# Altium PCB PCB_ChessBot V1.pcbdoc
Units mil, origin at the board's own origin, x right, y up, seen from the top; angles counter-clockwise.
Board outline 12624.15 x 12821 mil, 2 copper layers (Top Layer, Bottom Layer); 77 components, 87 nets, 345 pads, 82 vias.
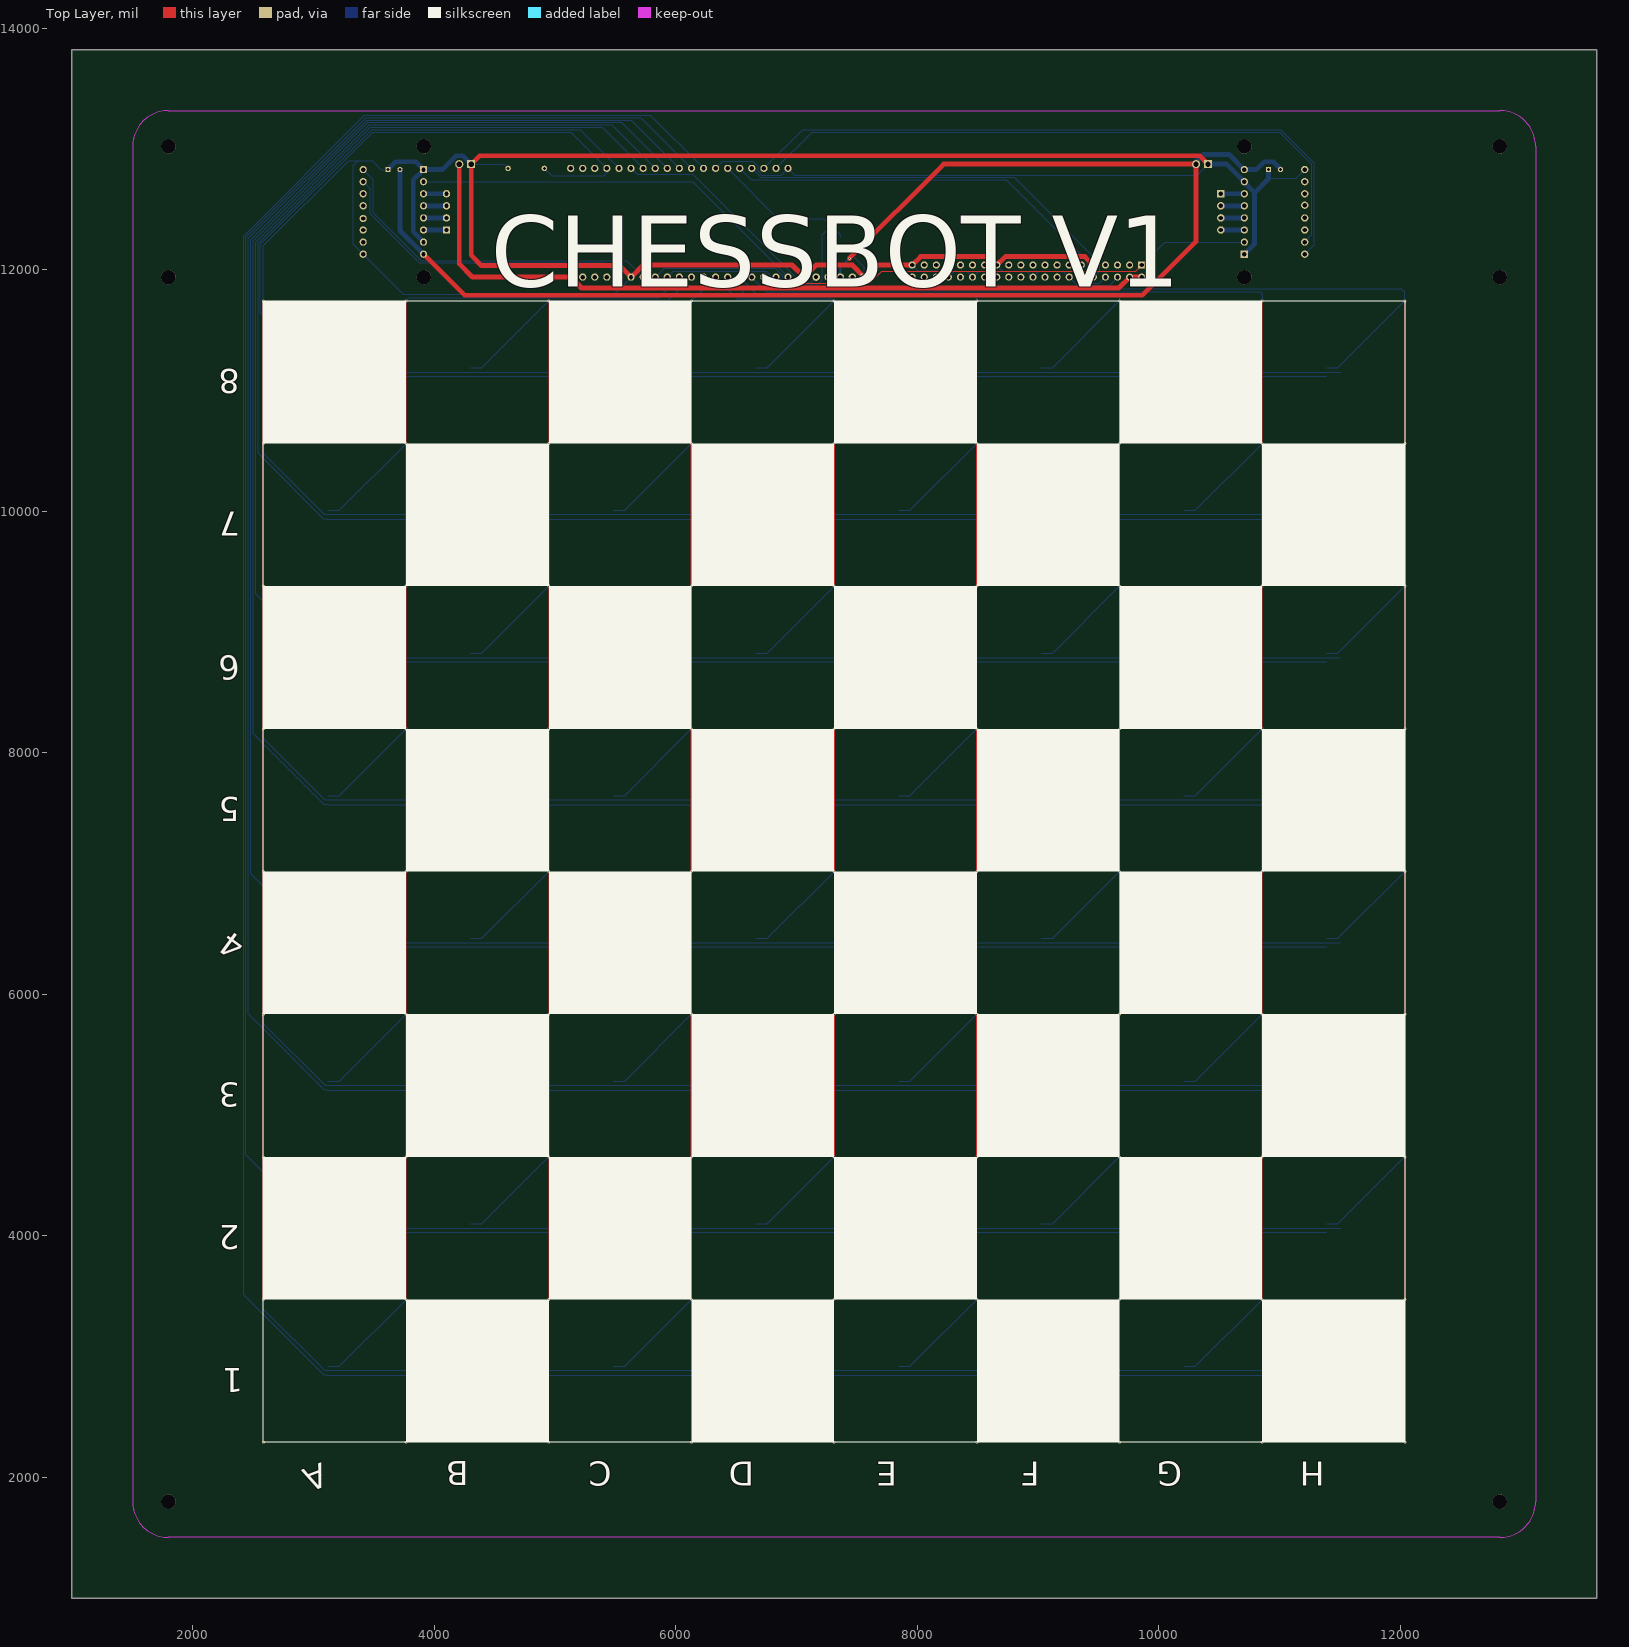
[diagram p0: Top Layer view]
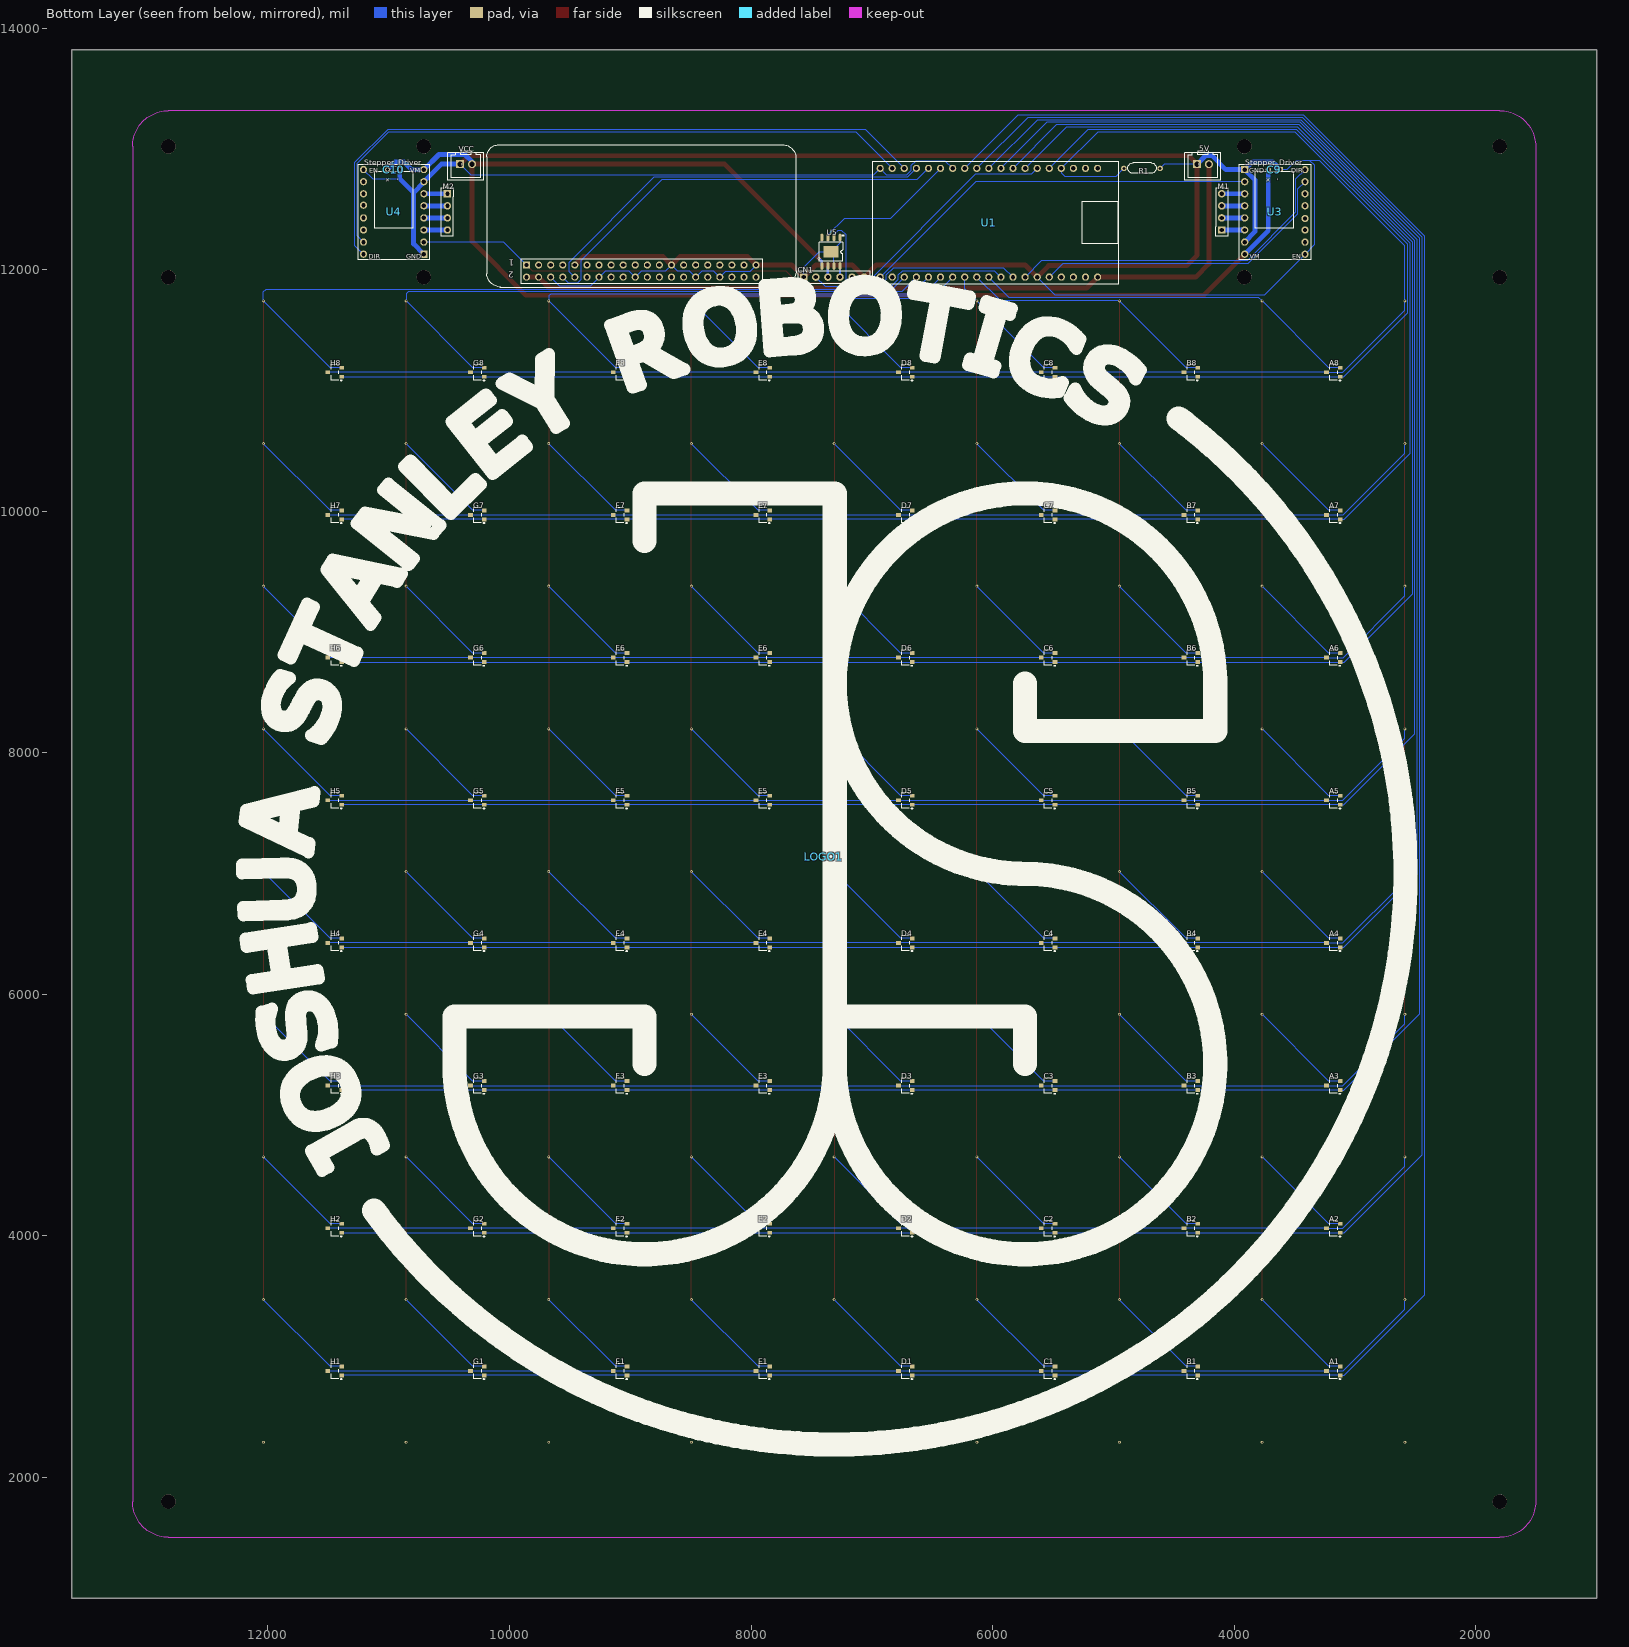
[diagram p1: Bottom Layer view, seen from below]

## Layer stack, top to bottom
Top Layer: signal copper (thickness not stored)
Dielectric: dielectric 12.6, FR-4, Dk 4.8
Bottom Layer: signal copper (thickness not stored)

## Board outline
13624.15,1000 1000,1000 1000,13821 13624.15,13821

## Components (designator, comment, footprint, x,y, rotation, side; value= is the part's Value field where it differs from the comment)
5V "XHB-2A" CONN-TH_XHB-2A 4258.27,12872.95 r180 bottom
A1 "AH49F" SC-59-3_L2.9-W1.6-P0.95-LS2.9-BR 3178.22,2882.95 r0 bottom
A2 "AH49F" SC-59-3_L2.9-W1.6-P0.95-LS2.9-BR 3178.22,4064.05 r0 bottom
A3 "AH49F" SC-59-3_L2.9-W1.6-P0.95-LS2.9-BR 3178.22,5245.15 r0 bottom
A4 "AH49F" SC-59-3_L2.9-W1.6-P0.95-LS2.9-BR 3178.22,6426.25 r0 bottom
A5 "AH49F" SC-59-3_L2.9-W1.6-P0.95-LS2.9-BR 3178.22,7607.35 r0 bottom
A6 "AH49F" SC-59-3_L2.9-W1.6-P0.95-LS2.9-BR 3178.22,8788.45 r0 bottom
A7 "AH49F" SC-59-3_L2.9-W1.6-P0.95-LS2.9-BR 3178.22,9969.55 r0 bottom
A8 "AH49F" SC-59-3_L2.9-W1.6-P0.95-LS2.9-BR 3178.22,11150.65 r0 bottom
B1 "AH49F" SC-59-3_L2.9-W1.6-P0.95-LS2.9-BR 4359.32,2882.95 r0 bottom
B2 "AH49F" SC-59-3_L2.9-W1.6-P0.95-LS2.9-BR 4359.32,4064.05 r0 bottom
B3 "AH49F" SC-59-3_L2.9-W1.6-P0.95-LS2.9-BR 4359.32,5245.15 r0 bottom
B4 "AH49F" SC-59-3_L2.9-W1.6-P0.95-LS2.9-BR 4359.32,6426.25 r0 bottom
B5 "AH49F" SC-59-3_L2.9-W1.6-P0.95-LS2.9-BR 4359.32,7607.35 r0 bottom
B6 "AH49F" SC-59-3_L2.9-W1.6-P0.95-LS2.9-BR 4359.32,8788.45 r0 bottom
B7 "AH49F" SC-59-3_L2.9-W1.6-P0.95-LS2.9-BR 4359.32,9969.55 r0 bottom
B8 "AH49F" SC-59-3_L2.9-W1.6-P0.95-LS2.9-BR 4359.32,11150.65 r0 bottom
C1 "AH49F" SC-59-3_L2.9-W1.6-P0.95-LS2.9-BR 5540.43,2882.95 r0 bottom
C2 "AH49F" SC-59-3_L2.9-W1.6-P0.95-LS2.9-BR 5540.43,4064.05 r0 bottom
C3 "AH49F" SC-59-3_L2.9-W1.6-P0.95-LS2.9-BR 5540.43,5245.15 r0 bottom
C4 "AH49F" SC-59-3_L2.9-W1.6-P0.95-LS2.9-BR 5540.43,6426.25 r0 bottom
C5 "AH49F" SC-59-3_L2.9-W1.6-P0.95-LS2.9-BR 5540.43,7607.35 r0 bottom
C6 "AH49F" SC-59-3_L2.9-W1.6-P0.95-LS2.9-BR 5540.43,8788.45 r0 bottom
C7 "AH49F" SC-59-3_L2.9-W1.6-P0.95-LS2.9-BR 5540.43,9969.55 r0 bottom
C8 "AH49F" SC-59-3_L2.9-W1.6-P0.95-LS2.9-BR 5540.43,11150.65 r0 bottom
C9 "100uF" "8X12 CAP" 3668.22,12827.95 r0 bottom
C10 "100uF" "8X12 CAP" 10958.23,12827.95 r0 bottom
CN1 "HDR-M-2.54_1x6" HDR-M-2.54_1X6 7313.23,11938.05 r0 bottom
D1 "AH49F" SC-59-3_L2.9-W1.6-P0.95-LS2.9-BR 6721.52,2882.95 r0 bottom
D2 "AH49F" SC-59-3_L2.9-W1.6-P0.95-LS2.9-BR 6721.52,4064.05 r0 bottom
D3 "AH49F" SC-59-3_L2.9-W1.6-P0.95-LS2.9-BR 6721.52,5245.15 r0 bottom
D4 "AH49F" SC-59-3_L2.9-W1.6-P0.95-LS2.9-BR 6721.52,6426.25 r0 bottom
D5 "AH49F" SC-59-3_L2.9-W1.6-P0.95-LS2.9-BR 6721.52,7607.35 r0 bottom
D6 "AH49F" SC-59-3_L2.9-W1.6-P0.95-LS2.9-BR 6721.52,8788.45 r0 bottom
D7 "AH49F" SC-59-3_L2.9-W1.6-P0.95-LS2.9-BR 6721.52,9969.55 r0 bottom
D8 "AH49F" SC-59-3_L2.9-W1.6-P0.95-LS2.9-BR 6721.52,11150.65 r0 bottom
E1 "AH49F" SC-59-3_L2.9-W1.6-P0.95-LS2.9-BR 7902.62,2882.95 r0 bottom
E2 "AH49F" SC-59-3_L2.9-W1.6-P0.95-LS2.9-BR 7902.62,4064.05 r0 bottom
E3 "AH49F" SC-59-3_L2.9-W1.6-P0.95-LS2.9-BR 7902.62,5245.15 r0 bottom
E4 "AH49F" SC-59-3_L2.9-W1.6-P0.95-LS2.9-BR 7902.62,6426.25 r0 bottom
E5 "AH49F" SC-59-3_L2.9-W1.6-P0.95-LS2.9-BR 7902.62,7607.35 r0 bottom
E6 "AH49F" SC-59-3_L2.9-W1.6-P0.95-LS2.9-BR 7902.62,8788.45 r0 bottom
E7 "AH49F" SC-59-3_L2.9-W1.6-P0.95-LS2.9-BR 7902.62,9969.55 r0 bottom
E8 "AH49F" SC-59-3_L2.9-W1.6-P0.95-LS2.9-BR 7902.62,11150.65 r0 bottom
F1 "AH49F" SC-59-3_L2.9-W1.6-P0.95-LS2.9-BR 9083.73,2882.95 r0 bottom
F2 "AH49F" SC-59-3_L2.9-W1.6-P0.95-LS2.9-BR 9083.73,4064.05 r0 bottom
F3 "AH49F" SC-59-3_L2.9-W1.6-P0.95-LS2.9-BR 9083.73,5245.15 r0 bottom
F4 "AH49F" SC-59-3_L2.9-W1.6-P0.95-LS2.9-BR 9083.73,6426.25 r0 bottom
F5 "AH49F" SC-59-3_L2.9-W1.6-P0.95-LS2.9-BR 9083.73,7607.35 r0 bottom
F6 "AH49F" SC-59-3_L2.9-W1.6-P0.95-LS2.9-BR 9083.73,8788.45 r0 bottom
F7 "AH49F" SC-59-3_L2.9-W1.6-P0.95-LS2.9-BR 9083.73,9969.55 r0 bottom
F8 "AH49F" SC-59-3_L2.9-W1.6-P0.95-LS2.9-BR 9083.73,11150.65 r0 bottom
G1 "AH49F" SC-59-3_L2.9-W1.6-P0.95-LS2.9-BR 10264.83,2882.95 r0 bottom
G2 "AH49F" SC-59-3_L2.9-W1.6-P0.95-LS2.9-BR 10264.83,4064.05 r0 bottom
G3 "AH49F" SC-59-3_L2.9-W1.6-P0.95-LS2.9-BR 10264.83,5245.15 r0 bottom
G4 "AH49F" SC-59-3_L2.9-W1.6-P0.95-LS2.9-BR 10264.83,6426.25 r0 bottom
G5 "AH49F" SC-59-3_L2.9-W1.6-P0.95-LS2.9-BR 10264.83,7607.35 r0 bottom
G6 "AH49F" SC-59-3_L2.9-W1.6-P0.95-LS2.9-BR 10264.83,8788.45 r0 bottom
G7 "AH49F" SC-59-3_L2.9-W1.6-P0.95-LS2.9-BR 10264.83,9969.55 r0 bottom
G8 "AH49F" SC-59-3_L2.9-W1.6-P0.95-LS2.9-BR 10264.83,11150.65 r0 bottom
H1 "AH49F" SC-59-3_L2.9-W1.6-P0.95-LS2.9-BR 11445.92,2882.95 r0 bottom
H2 "AH49F" SC-59-3_L2.9-W1.6-P0.95-LS2.9-BR 11445.92,4064.05 r0 bottom
H3 "AH49F" SC-59-3_L2.9-W1.6-P0.95-LS2.9-BR 11445.92,5245.15 r0 bottom
H4 "AH49F" SC-59-3_L2.9-W1.6-P0.95-LS2.9-BR 11445.92,6426.25 r0 bottom
H5 "AH49F" SC-59-3_L2.9-W1.6-P0.95-LS2.9-BR 11445.92,7607.35 r0 bottom
H6 "AH49F" SC-59-3_L2.9-W1.6-P0.95-LS2.9-BR 11445.92,8788.45 r0 bottom
H7 "AH49F" SC-59-3_L2.9-W1.6-P0.95-LS2.9-BR 11445.92,9969.55 r0 bottom
H8 "AH49F" SC-59-3_L2.9-W1.6-P0.95-LS2.9-BR 11445.92,11150.65 r0 bottom
LOGO1 "_" ? 7398.23,7137.95 r0 bottom
M1 "HDR-M-2.54_1x4" HDR-M-2.54_1X4 4103.23,12477.95 r270 bottom
M2 "HDR-M-2.54_1x4" HDR-M-2.54_1X4 10513.23,12477.95 r90 bottom
R1 "10k" "1/4W RESISTOR" 4613.23,12837.95 r180 bottom
U1 "ESP-WROOM-32" ESP32 6930.94,11938.05 r270 bottom
U3 "Stepper_Driver" STEPPER_DRIVER 3413.22,12127.95 r180 bottom
U4 "Stepper_Driver" STEPPER_DRIVER 11208.23,12827.95 r0 bottom
U5 "DRV8872DDARQ1" SO-8_L4.9-W3.9-P1.27-LS6.0-BL-EP5.1 7338.23,12147.95 r180 bottom
VCC "XHB-2A" CONN-TH_XHB-2A 10358.23,12872.95 r180 bottom

## Footprints (in the part's own frame and the unit in brackets; to place one, negate y for a bottom-side part, rotate by r counter-clockwise, add the part's x,y. Pads: shape width x height; smd on the part's side, far side on the other; paste and mask are expansions set on the pad)
"1/4W RESISTOR" [mil]
  round 45 hole 23.62 paste+0 mask+2: 1(0,0) 2(-300,0)
  silkscreen extent -268,-41 -32,46
"8X12 CAP" [mm]
  round 1.1 hole 0.6 paste+0 mask+0.051: 1(1.27,0)
  rect 1.1x1.1 hole 0.6 paste+0 mask+0.051: 2(-1.273,0)
  silkscreen extent -4,0.3 4,12.3
CONN-TH_XHB-2A [mm]
  rect 1.7x1.7 hole 1.1 paste+0 mask+0.051: 1(-1.251,0)
  round 1.7 hole 1.1 paste+0 mask+0.051: 2(1.251,0)
  silkscreen extent -3.86,-3.4 3.75,2.84
ESP32 [mil]
  round 60 hole 36 paste+0 mask+2: 1(0,0) 2(0,100) 3(0,200) 4(0,300) 5(0,400) 6(0,500) 7(0,600) 8(0,700) 9(0,800) 10(0,900) 11(0,1000) 12(0,1100) 13(0,1200) 14(0,1300) 15(0,1400) 16(0,1500) 17(0,1600) 18(0,1700) 19(0,1800) 20(-900,1800) 21(-900,1700) 22(-900,1600) 23(-900,1500) 24(-900,1400) 25(-900,1300) 26(-900,1200) 27(-900,1100) 28(-900,1000) 29(-900,900) 30(-900,800) 31(-900,700) 32(-900,600) 33(-900,500) 34(-900,400) 35(-900,300) 36(-900,200) 37(-900,100) 38(-900,0)
  silkscreen extent -960,-60 60,1970
HDR-M-2.54_1X4 [mil]
  rect 62x62 hole 35 paste+0 mask+2: 1(150,0)
  round 62 hole 35 paste+0 mask+2: 2(50,0) 3(-50,0) 4(-150,0)
  silkscreen extent -200,-50 200,50
HDR-M-2.54_1X6 [mil]
  rect 62x62 hole 35 paste+0 mask+2: 1(250,0)
  round 62 hole 35 paste+0 mask+2: 2(150,0) 3(50,0) 4(-50,0) 5(-150,0) 6(-250,0)
  silkscreen extent -300,-50 300,50
SC-59-3_L2.9-W1.6-P0.95-LS2.9-BR [mm]
  rect 1x0.8 smd paste+0 mask+0.051: 1(-1.45,0.95) 2(-1.45,-0.95) 3(1.45,0.015)
  silkscreen extent -1.49,-1.65 0.76,1.85
SO-8_L4.9-W3.9-P1.27-LS6.0-BL-EP5.1 [mm]
  oval 0.6x1.6 smd paste+0 mask+0.051: 1(1.905,3) 2(0.635,3) 3(-0.635,3) 4(-1.905,3) 5(-1.905,-3) 6(-0.635,-3) 7(0.635,-3) 8(1.905,-3)
  rect 3.1x2.4 smd paste+0 mask+0.051: 9(0,0)
  silkscreen extent -2.5,-2 2.71,3.6
STEPPER_DRIVER [mil]
  round 60 hole 36 paste+0 mask+2: 1(0,0) 2(0,100) 3(0,200) 4(0,295) 5(0,400) 6(0,500) 7(0,600) 8(0,700) 9(-500,0) 10(-500,100) 11(-500,200) 12(-500,300) 13(-500,400) 14(-500,500) 15(-500,600)
  rect 60x60 hole 36 paste+0 mask+2: 16(-500,700)
  silkscreen extent -545,-45 45,745
? [mil]
  silkscreen extent -4816,-4769 4816,4864

## Free pads (board coordinates)
  rect 59x59 hole 36 paste+0 mask+2: 1(9858.19,12037.95)
  round 59 hole 36 paste+0 mask+2: 2(9858.23,11937.95) 3(9758.23,12037.95) 4(9758.23,11937.95) 5(9658.23,12037.95) 6(9658.23,11937.95) 7(9558.23,12037.95) 8(9558.23,11937.95) 9(9458.23,12037.95) 10(9458.23,11937.95) 11(9358.23,12037.95) 12(9358.23,11937.95) 13(9258.23,12037.95) 14(9258.23,11937.95) 15(9158.23,12037.95) 16(9158.23,11937.95) 17(9058.23,12037.95) 18(9058.23,11937.95) 19(8958.23,12037.95) 20(8958.23,11937.95) 21(8858.23,12037.95) 22(8858.23,11937.95) 23(8758.23,12037.95) 24(8758.23,11937.95) 25(8658.23,12037.95) 26(8658.23,11937.95) 27(8558.23,12037.95) 28(8558.23,11937.95) 29(8458.23,12037.95) 30(8458.23,11937.95) 31(8358.23,12037.95) 32(8358.23,11937.95) 33(8258.23,12037.95) 34(8258.23,11937.95) 35(8158.23,12037.95) 36(8158.23,11937.95) 37(8058.23,12037.95) 38(8058.23,11937.95) 39(7958.23,12037.95) 40(7958.23,11937.95)
  round 120.08 hole 120.08 unplated paste+0: ""(1800.28,1800.27) ""(1800.28,11938.05) ""(1800.28,13020.72) ""(3916.41,11938.05) ""(3916.41,13020.72) ""(10707.74,11938.05) ""(10707.74,13020.72) ""(12823.88,1800.27) ""(12823.88,11938.05) ""(12823.88,13020.72)

## Via types
v1: diameter 24.41, hole 12.2, Top Layer to Bottom Layer, tented both sides, 82 vias

## Nets (pads, with @x,y where several pads share a name; then routed paths per layer and width w, separated by ;. In a path a pad name is that pad's centre, name@x,y a point inside that pad or via, vN(x,y) a via of type N, cw(c..) or ccw(c..) an arc to the next point about the centre after c; other vN are vias at no path point)
1: A1.1 B1.1 C1.1 D1.1 E1.1 F1.1 G1.1 H1.1 U1.31 | length 22411.2
  Bottom Layer w10: A1.1 3090.62,2845.55 2423.22,3512.95 2423.22,12277.95 3423.22,13277.95 5791.02,13277.95 U1.31 ; A1.1 H1.1
2: A2.1 B2.1 C2.1 D2.1 E2.1 F2.1 G2.1 H2.1 U1.30 | length 21080
  Bottom Layer w10: A2.1 3089.53,4026.65 2443.22,4672.95 2443.22,12267.95 3433.22,13257.95 5711.02,13257.95 U1.30 ; A2.1 H2.1
3: A3.1 B3.1 C3.1 D3.1 E3.1 F3.1 G3.1 H3.1 U1.29 | length 19745.9
  Bottom Layer w10: A3.1 3093.43,5207.75 2463.22,5837.95 2463.22,12257.95 3443.22,13237.95 5631.02,13237.95 U1.29 ; A3.1 H3.1
3V3: pad.1 U1.1 U3.15 U4.15 | length 7283.8
  Top Layer w10: U1.1 6981.02,11887.95 7608.23,11887.95 7708.23,11987.95 9808.23,11987.95 pad.1
  Bottom Layer w10: U3.15 6141.02,12727.95 U1.1 ; pad.1 10048.19,12227.95 U4.15
4: A4.1 B4.1 C4.1 D4.1 E4.1 F4.1 G4.1 H4.1 U1.28 | length 18414.7
  Bottom Layer w10: A4.1 3092.32,6388.85 2483.22,6997.95 2483.22,12247.95 3453.22,13217.95 5551.02,13217.95 U1.28 ; A4.1 H4.1
5: A5.1 B5.1 C5.1 D5.1 E5.1 F5.1 G5.1 H5.1 U1.27 | length 17083.6
  Bottom Layer w10: A5.1 3091.22,7569.95 2503.22,8157.95 2503.22,12237.95 3463.22,13197.95 5471.02,13197.95 U1.27 ; A5.1 H5.1
6: A6.1 B6.1 C6.1 D6.1 E6.1 F6.1 G6.1 H6.1 U1.26 | length 15752.4
  Bottom Layer w10: A6.1 3090.12,8751.05 2523.22,9317.95 2523.22,12227.95 3473.22,13177.95 5391.02,13177.95 U1.26 ; A6.1 H6.1
7: A7.1 B7.1 C7.1 D7.1 E7.1 F7.1 G7.1 H7.1 U1.24 | length 14321.2
  Bottom Layer w10: A7.1 3089.03,9932.15 2543.22,10477.95 2543.22,12217.95 3483.22,13157.95 5211.02,13157.95 U1.24 ; A7.1 H7.1
8: A8.1 B8.1 C8.1 D8.1 E8.1 F8.1 G8.1 H8.1 R1.2 U1.23 | length 13580.7
  Bottom Layer w10: A8.1 3092.93,11113.25 2563.22,11642.95 2563.22,12207.95 3493.22,13137.95 5131.02,13137.95 U1.23 ; A8.1 H8.1 ; R1.2 4978.23,12772.95 5403.23,12772.95 5430.94,12800.66 U1.23
+5V: 5V.2 pad.2 pad.4 U1.19 | length 6594.9
  Top Layer w40: 5V.2 4209.02,12047.15 4318.23,11937.95 U1.19 5221.02,11847.95 9668.23,11847.95 pad.4 9858.12,11937.95 pad.2
A: A1.2 A2.2 A3.2 A4.2 A5.2 A6.2 A7.2 A8.2 U1.10 | length 17625.5
  Top Layer w10: v1(3768.78,3473.5) v1(3768.78,11741.2)
  Bottom Layer w10: A1.2 3215.62,2920.35 v1(3768.78,3473.5) ; A2.2 3215.62,4101.45 v1(3768.78,4654.6) ; A3.2 3215.62,5282.55 v1(3768.78,5835.7) ; A4.2 3215.62,6463.65 v1(3768.78,7016.8) ; A5.2 3215.62,7644.75 v1(3768.78,8197.9) ; A6.2 3215.62,8825.85 v1(3768.78,9379) ; A7.2 3215.62,10006.95 v1(3768.78,10560.1) ; A8.2 3215.62,11188.05 v1(3768.78,11741.2) ; v1@3768.72,11741.15 3795.53,11767.95 5860.82,11767.95 U1.10
B: B1.2 B2.2 B3.2 B4.2 B5.2 B6.2 B7.2 B8.2 U1.9 | length 16544.3
  Top Layer w10: v1(4949.88,3473.5) v1(4949.88,11741.2)
  Bottom Layer w10: B1.2 4396.73,2920.35 v1(4949.88,3473.5) ; B2.2 4396.73,4101.45 v1(4949.88,4654.6) ; B3.2 4396.73,5282.55 v1(4949.88,5835.7) ; B4.2 4396.73,6463.65 v1(4949.88,7016.8) ; B5.2 4396.73,7644.75 v1(4949.88,8197.9) ; B6.2 4396.73,8825.85 v1(4949.88,9379) ; B7.2 4396.73,10006.95 v1(4949.88,10560.1) ; B8.2 4396.73,11188.05 v1(4949.88,11741.2) 5934.09,11741.2 U1.9
C: C1.2 C2.2 C3.2 C4.2 C5.2 C6.2 C7.2 C8.2 U1.8 | length 15520
  Top Layer w10: v1(6130.98,3473.5) v1(6130.98,8197.9) v1(6130.98,11741.2)
  Bottom Layer w10: C1.2 5577.82,2920.35 v1(6130.98,3473.5) ; C2.2 5577.82,4101.45 v1(6130.98,4654.6) ; C3.2 5577.82,5282.55 v1(6130.98,5835.7) ; C4.2 5577.82,6463.65 v1(6130.98,7016.8) ; C5.2 5577.82,7644.75 v1(6130.98,8197.9) ; C6.2 5577.82,8825.85 v1(6130.98,9379) ; C7.2 5577.82,10006.95 v1(6130.98,10560.1) ; C8.2 5577.82,11188.05 v1(6130.98,11741.2) ; v1@6130.93,11741.15 6230.93,11841.15 U1.8
D: D1.2 D2.2 D3.2 D4.2 D5.2 D6.2 D7.2 D8.2 U1.7 | length 16344.4
  Top Layer w10: v1(7312.07,3473.5) v1(7312.07,11741.2)
  Bottom Layer w10: U1.7 6511.02,11757.95 7295.32,11757.95 v1@7312.02,11741.15 ; D1.2 6758.93,2920.35 v1(7312.07,3473.5) ; D2.2 6758.93,4101.45 v1(7312.07,4654.6) ; D3.2 6758.93,5282.55 v1(7312.07,5835.7) ; D4.2 6758.93,6463.65 v1(7312.07,7016.8) ; D5.2 6758.93,7644.75 v1(7312.07,8197.9) ; D6.2 6758.93,8825.85 v1(7312.07,9379) ; D7.2 6758.93,10006.95 v1(7312.07,10560.1) ; D8.2 6758.93,11188.05 v1(7312.07,11741.2)
DIR1: U1.13 U3.8 | length 2847.4
  Bottom Layer w10: U3.8 3493.22,12747.95 3493.22,12472.95 3893.22,12072.95 5596.02,12072.95 U1.13
DIR2: U1.36 U4.8 | length 5584.8
  Bottom Layer w10: U1.36 7050.82,13157.95 11008.23,13157.95 11283.23,12882.95 11283.23,12202.95 U4.8
E: E1.2 E2.2 E3.2 E4.2 E5.2 E6.2 E7.2 E8.2 U1.6 | length 17438.3
  Top Layer w10: v1(8493.17,3473.5) v1(8493.17,11741.2)
  Bottom Layer w10: U1.6 6591.02,11777.95 8478.23,11777.95 8493.23,11762.95 v1(8493.17,11741.2) ; E1.2 7940.02,2920.35 v1(8493.17,3473.5) ; E2.2 7940.02,4101.45 v1(8493.17,4654.6) ; E3.2 7940.02,5282.55 v1(8493.17,5835.7) ; E4.2 7940.02,6463.65 v1(8493.17,7016.8) ; E5.2 7940.02,7644.75 v1(8493.17,8197.9) ; E6.2 7940.02,8825.85 v1(8493.17,9379) ; E7.2 7940.02,10006.95 v1(8493.17,10560.1) ; E8.2 7940.02,11188.05 v1(8493.17,11741.2)
EN: U1.2
F: F1.2 F2.2 F3.2 F4.2 F5.2 F6.2 F7.2 F8.2 U1.5 | length 18526
  Top Layer w10: v1@9674.27,3477.95 v1(9674.27,11741.2)
  Bottom Layer w10: U1.5 6671.02,11797.95 9658.23,11797.95 9674.23,11781.95 v1@9674.23,11741.15 ; F1.2 9121.12,2920.35 v1(9674.27,3473.5) ; F2.2 9121.12,4101.45 v1(9674.27,4654.6) ; F3.2 9121.12,5282.55 v1(9674.27,5835.7) ; F4.2 9121.12,6463.65 v1(9674.27,7016.8) ; F5.2 9121.12,7644.75 v1(9674.27,8197.9) ; F6.2 9121.12,8825.85 v1(9674.27,9379) ; F7.2 9121.12,10006.95 v1(9674.27,10560.1) ; F8.2 9121.12,11188.05 v1(9674.27,11741.2)
G: G1.2 G2.2 G3.2 G4.2 G5.2 G6.2 G7.2 G8.2 U1.4 | length 19622.6
  Top Layer w10: v1(10855.38,3473.5) v1(10855.38,11741.2)
  Bottom Layer w10: U1.4 6751.02,11817.95 10838.23,11817.95 10855.33,11800.85 v1@10855.33,11741.15 ; G1.2 10302.23,2920.35 v1(10855.38,3473.5) ; G2.2 10302.23,4101.45 v1(10855.38,4654.6) ; G3.2 10302.23,5282.55 v1(10855.38,5835.7) ; G4.2 10302.23,6463.65 v1(10855.38,7016.8) ; G5.2 10302.23,7644.75 v1(10855.38,8197.9) ; G6.2 10302.23,8825.85 v1(10855.38,9379) ; G7.2 10302.23,10006.95 v1(10855.38,10560.1) ; G8.2 10302.23,11188.05 v1(10855.38,11741.2)
GND: 5V.1 A1.3 A2.3 A3.3 A4.3 A5.3 A6.3 A7.3 A8.3 B1.3 B2.3 B3.3 B4.3 B5.3 B6.3 B7.3 B8.3 C1.3 C2.3 C3.3 C4.3 C5.3 C6.3 C7.3 C8.3 C9.2 C10.2 CN1.1 CN1.6 D1.3 D2.3 D3.3 D4.3 D5.3 D6.3 D7.3 D8.3 E1.3 E2.3 E3.3 E4.3 E5.3 E6.3 E7.3 E8.3 F1.3 F2.3 F3.3 F4.3 F5.3 F6.3 F7.3 F8.3 G1.3 G2.3 G3.3 G4.3 G5.3 G6.3 G7.3 G8.3 H1.3 H2.3 H3.3 H4.3 H5.3 H6.3 H7.3 H8.3 pad.6 pad.9 pad.14 pad.20 pad.25 pad.30 pad.34 pad.39 R1.1 U1.14 U1.32 U1.38 U3.1 U3.10 U3.16 U4.1 U4.10 U4.16 U5.1 U5.7 U5.9 VCC.1 | length 109720.3
  Top Layer w10: v1(2587.68,3473.5) v1(2587.68,11741.2)
  Top Layer w40: pad.25 8728.23,12107.95 9388.32,12107.95 pad.9 ; pad.25 8588.32,12107.95 8028.23,12107.95 pad.39 7663.12,12037.95 CN1.1 7463.32,12037.95 7163.12,12037.95 CN1.6 6963.32,12037.95 5730.82,12037.95 U1.14 5536.02,12032.95 4393.23,12032.95 4307.52,12118.65 5V.1 4377.52,12942.95 10337.42,12942.95 VCC.1@10407.42,12872.95
  Bottom Layer w10: v1@2587.72,3473.45 2587.72,3393.45 3098.82,2882.35 A1.3 H1.3 ; v1(2587.68,4654.6) 2587.72,4578.45 3102.72,4063.45 A2.3 H2.3 ; v1@2587.72,5835.65 2587.72,5758.45 3101.62,5244.55 A3.3 H3.3 ; v1(2587.68,7016.8) 2587.72,6938.45 3100.53,6425.65 A4.3 H4.3 ; v1@2587.72,8197.95 2587.72,8118.45 3099.43,7606.75 A5.3 H5.3 ; v1(2587.68,9379) 2587.72,9298.45 3098.32,8787.85 A6.3 H6.3 ; v1@2587.72,10560.15 2587.72,10478.45 3097.22,9968.95 A7.3 H7.3 ; 3381.03,12902.95 3293.22,12902.95 2587.72,12197.45 v1(2587.68,11741.2) 2587.72,11663.45 3101.12,11150.05 A8.3 H8.3 ; C9.2 3563.22,12827.95 3488.22,12902.95 3373.22,12902.95 3333.22,12862.95 3333.22,12207.95 U3.1 3748.22,11792.95 5485.82,11792.95 U1.14 ; 5V.1 4578.23,12872.95 R1.1 ; U1.32 6390.82,12897.95 6638.23,12897.95 6678.23,12857.95 6678.23,12817.95 6713.23,12782.95 6875.82,12782.95 U1.38 6986.02,12782.95 10317.42,12782.95 VCC.1@10407.42,12872.95 ; U5.1 7263.22,12222.95 U5.9 ; U5.7 7313.23,12147.95 U5.9 ; CN1.1 7563.23,12017.95 7433.23,12147.95 U5.9 ; pad.39 8008.23,11987.95 8208.32,11987.95 pad.34 ; pad.34 8308.23,11987.95 8408.32,11987.95 pad.30 ; pad.30 8508.23,11987.95 8608.13,11987.95 pad.25 ; pad.25 8708.23,11987.95 8908.32,11987.95 pad.20 ; pad.20 9008.23,11987.95 9208.32,11987.95 pad.14 ; pad.14 9328.23,11867.95 9588.13,11867.95 pad.6 ; 10908.1,12752.83 11133.1,12752.83 U4.1
  Bottom Layer w40: C9.2 3683.11,12892.95 3848.22,12892.95 U3.16 ; U3.10 3828.22,12312.95 3828.22,12742.95 U3.16 ; 5V.1 4237.52,12942.95 4183.23,12942.95 4068.22,12827.95 U3.16 ; VCC.1 10563.23,12872.95 U4.10 10708.23,12722.95 10793.23,12637.95 ; U4.16 10793.23,12212.95 10793.23,12637.95 ; C10.2 10908.1,12752.83 10793.23,12637.95
  other v1: 2587.68,5835.7 2587.68,8197.9 2587.68,10560.1
H: H1.2 H2.2 H3.2 H4.2 H5.2 H6.2 H7.2 H8.2 U1.3 | length 20712
  Top Layer w10: v1(12036.48,3473.5) v1(12036.48,11741.2)
  Bottom Layer w10: U1.3 6831.02,11837.95 12013.23,11837.95 12036.52,11814.75 v1(12036.48,11741.2) ; H1.2 11483.33,2920.35 v1(12036.48,3473.5) ; H2.2 11483.33,4101.45 v1(12036.48,4654.6) ; H3.2 11483.33,5282.55 v1(12036.48,5835.7) ; H4.2 11483.33,6463.65 v1(12036.48,7016.8) ; H5.2 11483.33,7644.75 v1(12036.48,8197.9) ; H6.2 11483.33,8825.85 v1(12036.48,9379) ; H7.2 11483.33,10006.95 v1(12036.48,10560.1) ; H8.2 11483.33,11188.05 v1(12036.48,11741.2)
MAG+: U1.12 U5.2 | length 2036.3
  Bottom Layer w10: U1.12 5905.82,12012.95 6823.23,12012.95 6883.23,11952.95 6883.23,11917.95 6927.12,11874.05 7174.32,11874.05 7213.23,11912.95 7213.23,12287.95 7248.23,12322.95 7283.23,12322.95 7313.23,12292.95 U5.2@7313.23,12266.05
MAG-: U1.33 U5.3 | length 1182.1
  Bottom Layer w10: U1.33 6846.02,12422.95 7228.23,12422.95 7363.23,12287.95 U5.3@7363.23,12266.05
S$160: 
S$162: 
S$164: 
S$166: 
S$17535: 
S$17539: 
S$17543: 
S$17547: 
STEP1: U1.15 U3.7 | length 2565
  Bottom Layer w10: U3.7 3473.22,12667.95 3473.22,12462.95 3883.22,12052.95 5416.02,12052.95 U1.15
STEP2: U1.37 U4.7 | length 5337
  Bottom Layer w10: U1.37 7130.82,13137.95 11003.23,13137.95 11263.23,12877.95 11263.23,12282.95 U4.7
U1_34: pad.8 U1.34 | length 3532.4
  Bottom Layer w10: U1.34 6626.02,12742.95 8738.23,12742.95 9408.23,12072.95 9408.23,11917.95 9438.23,11887.95 9508.23,11887.95 pad.8
U1_35: pad.10 U1.35 | length 3341.1
  Bottom Layer w10: U1.35 6706.02,12762.95 8803.23,12762.95 9508.23,12057.95 9508.23,11987.95 pad.10
U2_3: pad.3
U2_5: pad.5
U2_7: pad.7
U2_11: pad.11
U2_12: pad.12
U2_13: pad.13
U2_15: pad.15
U2_16: pad.16
U2_17: pad.17
U2_18: pad.18
U2_19: pad.19
U2_21: pad.21
U2_22: pad.22
U2_23: pad.23
U2_24: pad.24
U2_26: pad.26
U2_27: pad.27
U2_28: pad.28
U2_29: pad.29
U2_31: pad.31
U2_32: pad.32
U2_33: pad.33
U2_35: pad.35
U2_36: pad.36
U2_37: pad.37
U2_38: pad.38
U2_40: pad.40
U3_2: U3.2
U3_3: U3.3
U3_4: U3.4
U3_5: U3.5
U3_6: U3.6
U3_11: M1.1 U3.11 | length 191.8
  Bottom Layer w40: U3.11 4104.11,12327.95 M1.1
U3_12: M1.2 U3.12 | length 190
  Bottom Layer w40: U3.12 M1.2
U3_13: M1.3 U3.13 | length 190.6
  Bottom Layer w40: U3.13 3914.66,12526.51 M1.3
U3_14: M1.4 U3.14 | length 190
  Bottom Layer w40: U3.14 4095.82,12627.95 M1.4
U4_2: U4.2
U4_3: U4.3
U4_4: U4.4
U4_5: U4.5
U4_6: U4.6
U4_11: M2.1 U4.11 | length 195
  Bottom Layer w40: M2.1 10515.93,12627.95 U4.11
U4_12: M2.2 U4.12 | length 195
  Bottom Layer w40: M2.2 10514.37,12527.95 U4.12
U4_13: M2.3 U4.13 | length 195.3
  Bottom Layer w40: M2.3@10512.93,12428.05 U4.13
U4_14: M2.4 U4.14 | length 195
  Bottom Layer w40: M2.4 10514.64,12327.95 U4.14
U5_4: U5.4
U5_6: CN1.3 U5.6 | length 91.9
  Bottom Layer w20: CN1.3 U5.6
U5_8: CN1.4 U5.8 | length 91.9
  Bottom Layer w20: CN1.4 U5.8
VCC: C9.1 C10.1 U3.9 U4.9 U5.5 VCC.2 | length 12261.6
  Top Layer w40: U3.9 4253.23,11787.95 9863.23,11787.95 10309.02,12233.75 VCC.2 8218.23,12872.95 v1(7438.23,12092.95)
  Bottom Layer w20: U5.5 7413.23,12067.95 v1(7438.23,12092.95)
  Bottom Layer w40: C9.1 3718.22,12322.95 U3.9 ; VCC.2 10309.02,12893.65 10368.23,12952.95 10583.23,12952.95 U4.9 10808.23,12827.95 10873.23,12892.95 10948.23,12892.95 11008.23,12832.95 C10.1
XLIM: CN1.5 U1.25 | length 1942.5
  Bottom Layer w10: U1.25 5681.02,12787.95 6143.23,12787.95 7038.23,11892.95 7118.12,11892.95 CN1.5
YLIM: CN1.2 U1.11 | length 1660.5
  Bottom Layer w10: U1.11 5980.82,11987.95 6748.23,11987.95 6783.23,11952.95 6783.23,11917.95 6843.23,11857.95 7383.12,11857.95 CN1.2
pads on no net: U1.16 U1.17 U1.18 U1.20 U1.21 U1.22
copper on no net:
  other v1: 2587.68,2292.4 3768.78,2292.4 4949.88,2292.4 6130.98,2292.4 7312.07,2292.4 8493.17,2292.4 9674.27,2292.4 10855.38,2292.4 12036.48,2292.4

## Keep-outs
Keep-Out Layer:
  lines w10: 1505,1800.28 ccw(c1800.28,1800.28) 1800.28,1505
  lines w10 net S$17535: 1505,13020.73 cw(c1800.28,13020.73) 1800.28,13316
  lines w10 net S$17539: 12823.88,13316 cw(c12823.88,13020.73) 13119.15,13020.73
  lines w10 net S$17543: 12823.88,1505 ccw(c12823.88,1800.28) 13119.15,1800.28

## Silkscreen, mask and mechanical layers (free items; w line width, h text height)
Top Overlay:
  rectangle: 3768.78,2292.4 4949.88,3473.5
  rectangle: 2587.68,3473.5 3768.78,4654.6
  rectangle: 6130.98,2292.4 7312.07,3473.5
  rectangle: 3768.78,4654.6 4949.88,5835.7
  rectangle: 6130.98,4654.6 7312.07,5835.7
  rectangle: 4949.88,3473.5 6130.98,4654.6
  rectangle: 8493.17,2292.4 9674.27,3473.5
  rectangle: 7312.07,3473.5 8493.17,4654.6
  rectangle: 8493.17,4654.6 9674.27,5835.7
  rectangle: 4949.88,5835.7 6130.98,7016.8
  rectangle: 2587.68,5835.7 3768.78,7016.8
  rectangle: 3768.78,7016.8 4949.88,8197.9
  rectangle: 6130.98,7016.8 7312.07,8197.9
  rectangle: 8493.17,7016.8 9674.27,8197.9
  rectangle: 7312.07,5835.7 8493.17,7016.8
  rectangle: 10855.38,4654.6 12036.48,5835.7
  rectangle: 10855.38,2292.4 12036.48,3473.5
  rectangle: 9674.27,3473.5 10855.38,4654.6
  rectangle: 9674.27,5835.7 10855.38,7016.8
  rectangle: 10855.38,7016.8 12036.48,8197.9
  rectangle: 9674.27,8197.9 10855.38,9379
  rectangle: 7312.07,8197.9 8493.17,9379
  rectangle: 4949.88,8197.9 6130.98,9379
  rectangle: 2587.68,8197.9 3768.78,9379
  rectangle: 3768.78,9379 4949.88,10560.1
  rectangle: 6130.98,9379 7312.07,10560.1
  rectangle: 8493.17,9379 9674.27,10560.1
  rectangle: 10855.38,9379 12036.48,10560.1
  rectangle: 9674.27,10560.1 10855.38,11741.2
  rectangle: 7312.07,10560.1 8493.17,11741.2
  rectangle: 4949.88,10560.1 6130.98,11741.2
  rectangle: 2587.68,10560.1 3768.78,11741.2
  lines w10: 2587.68,2292.4 12036.48,2292.4 12036.48,11741.2 2587.68,11741.2 2587.68,2292.4
  text "CHESSBOT V1" at 4468.23,11857.67 h590.55
  text "8" at 2393.11,11174.71 h200 r180
  text "7" at 2393.97,9994.32 h200 r180
  text "6" at 2384.91,8812.19 h200 r185
  text "5" at 2393.16,7631.78 h200 r180
  text "4" at 2452.11,6430.89 h200 r144
  text "3" at 2393.11,5269.37 h200 r180
  text "2" at 2393.38,4087.78 h200 r180
  text "1" at 2418.86,2906.9 h200 r180
  text "B" at 4287.44,2133.82 h200 r180
  text "D" at 6651.12,2132.93 h200 r180
  text "E" at 7832.73,2132.85 h200 r180
  text "H" at 11375.15,2132.75 h200 r180
  text "C" at 5471.02,2132.34 h200 r180
  text "F" at 9013.55,2132.42 h200 r180
  text "G" at 10195.49,2132.19 h200 r180
  text "A" at 3072.39,2126.31 h200 r201
Bottom Overlay:
  lines w7.9: 7908.19,11887.95 7908.19,12087.95 9908.19,12087.95 9908.19,11887.95 7908.19,11887.95
  lines w10: 7626.89,11990.15 ccw(c7762.73,11990.15) 7777.73,11855.15 ; 7627.73,12925.15 cw(c7742.73,12920.15) 7747.12,13035.18 ; 10071.88,11854.81 ccw(c10067.73,11975.15) 10187.73,11965.15 ; 10077.73,13035.15 cw(c10082.73,12930.15) 10187.68,12935.97
  lines w10 net S$160: 7777.73,11855.15 10077.73,11855.15
  lines w10 net S$162: 7627.73,11985.15 7627.73,12925.15
  lines w10 net S$164: 7747.73,13035.15 10077.73,13035.15
  lines w10 net S$166: 10187.73,11965.15 10187.73,12935.15
  text "1" at 9958.23,12082.95 h50 r180
  text "2" at 9962.23,11982.95 h50 r180

## Text inside footprints (layer, text, board x,y; h text height)
C9: Bottom Overlay "+" at 3747.14,12744.03 h39.37 r45; Bottom Overlay "-" at 3652.91,12757.95 h39.37 r90
C10: Bottom Overlay "+" at 11037.14,12744.03 h39.37 r45; Bottom Overlay "-" at 10942.91,12757.95 h39.37 r90
U3: Bottom Overlay "EN" at 3520.03,12088.17 h39.37; Bottom Overlay "DIR" at 3529.22,12802.47 h39.37; Bottom Overlay "VM" at 3870.03,12088.17 h39.37; Bottom Overlay "GND" at 3874.22,12802.47 h39.37
U4: Bottom Overlay "EN" at 11162.41,12802.57 h39.37; Bottom Overlay "DIR" at 11163.23,12088.26 h39.37; Bottom Overlay "VM" at 10822.41,12802.57 h39.37; Bottom Overlay "GND" at 10853.23,12088.26 h39.37